# Altium PCB Infrared_Send.PcbDoc
Units mil, origin at the board's own origin, x right, y up, seen from the top; angles counter-clockwise.
Board outline 2559.06 x 1968.5 mil, 2 copper layers (Top Layer, Bottom Layer); 27 components, 26 nets, 105 pads, 30 vias.
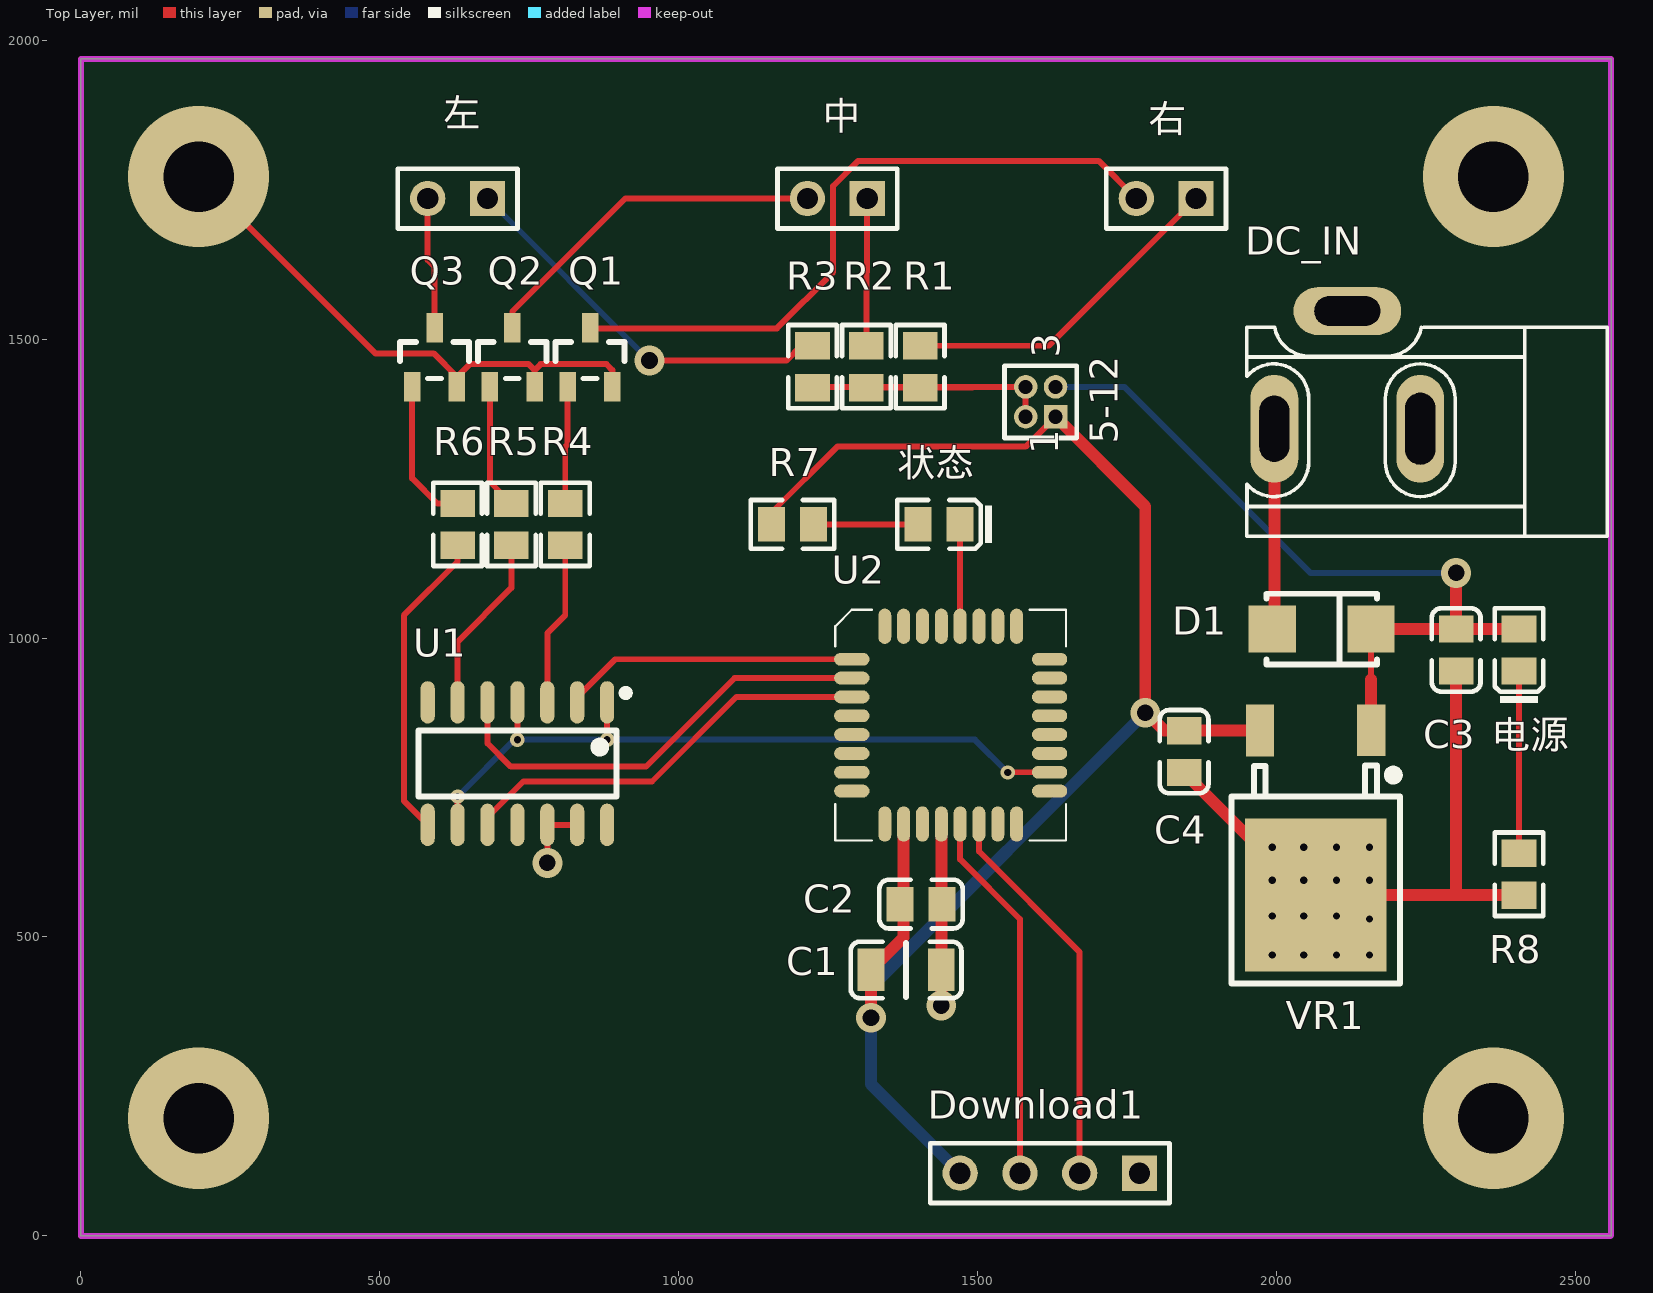
[diagram p0: Top Layer view]
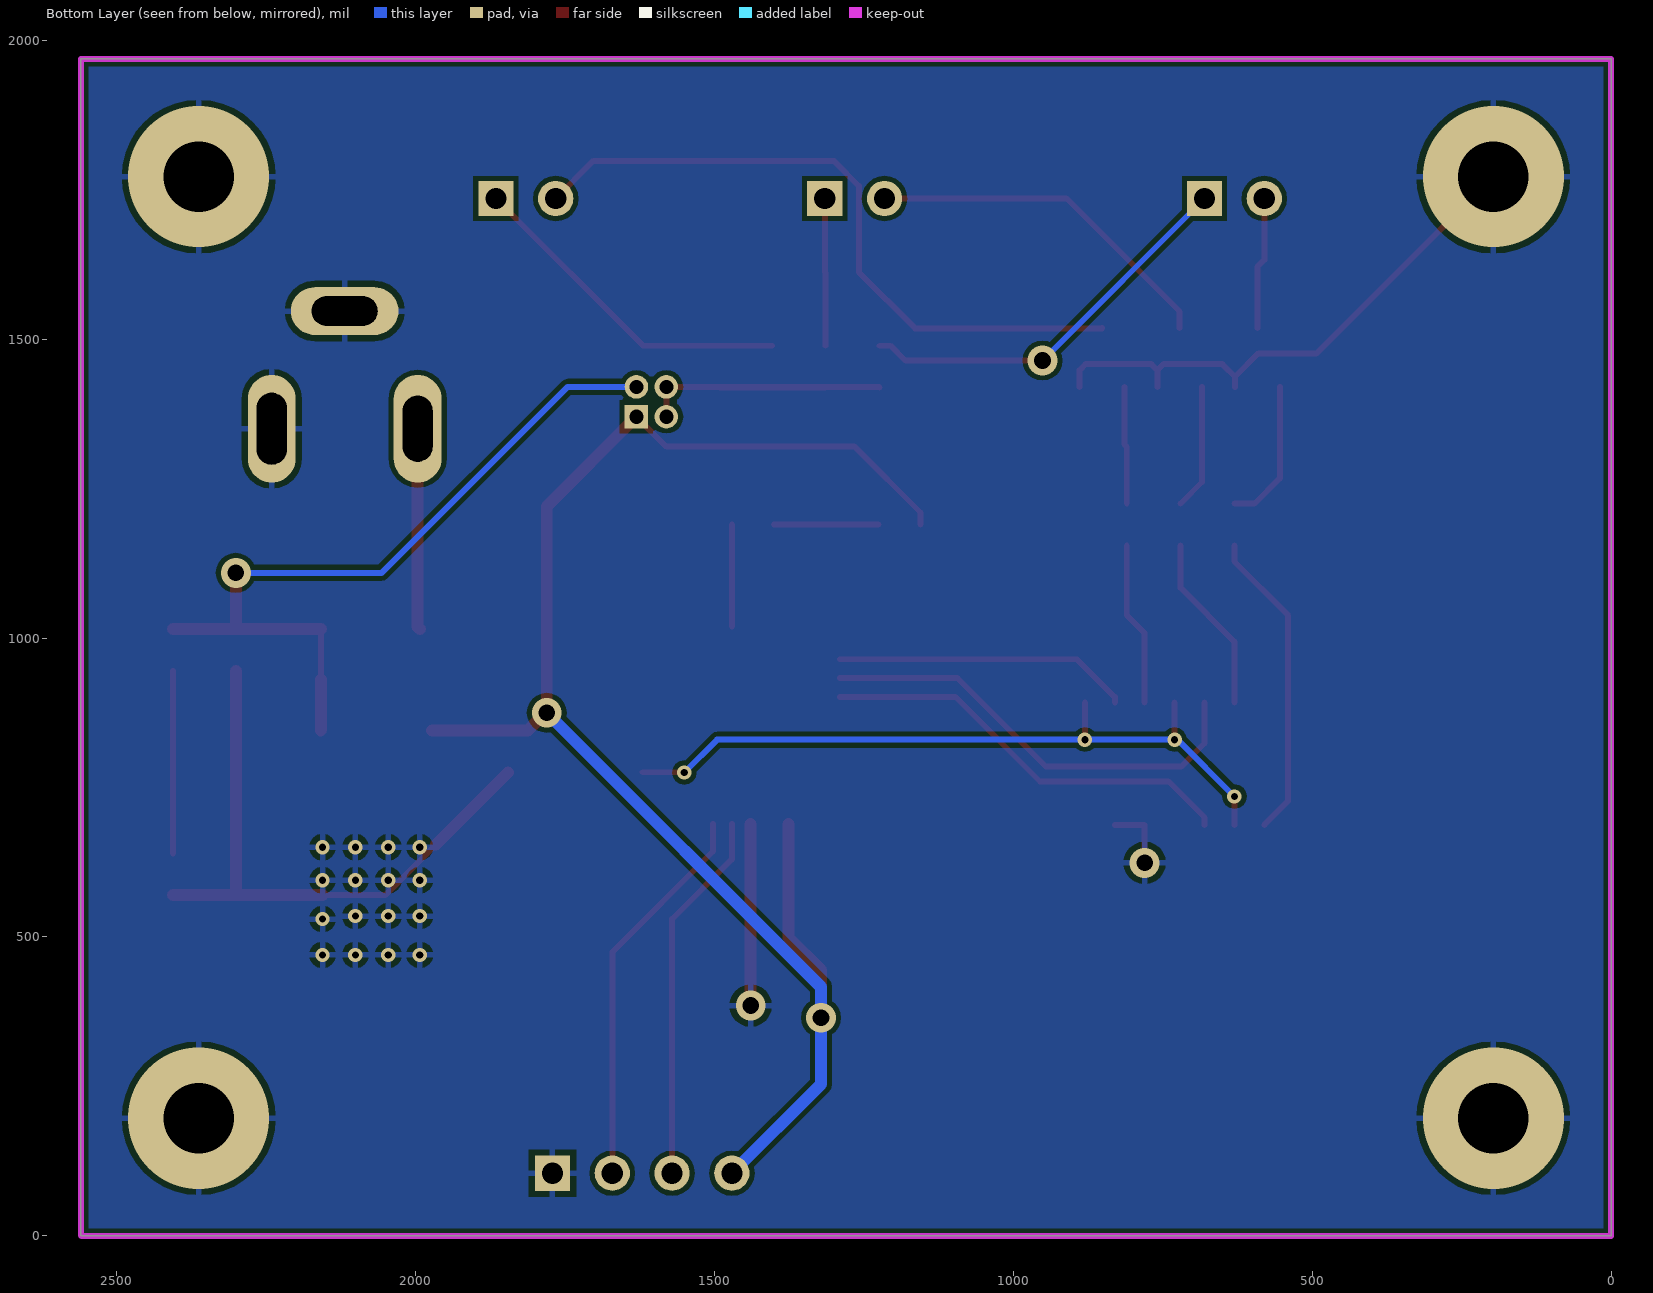
[diagram p1: Bottom Layer view, seen from below]
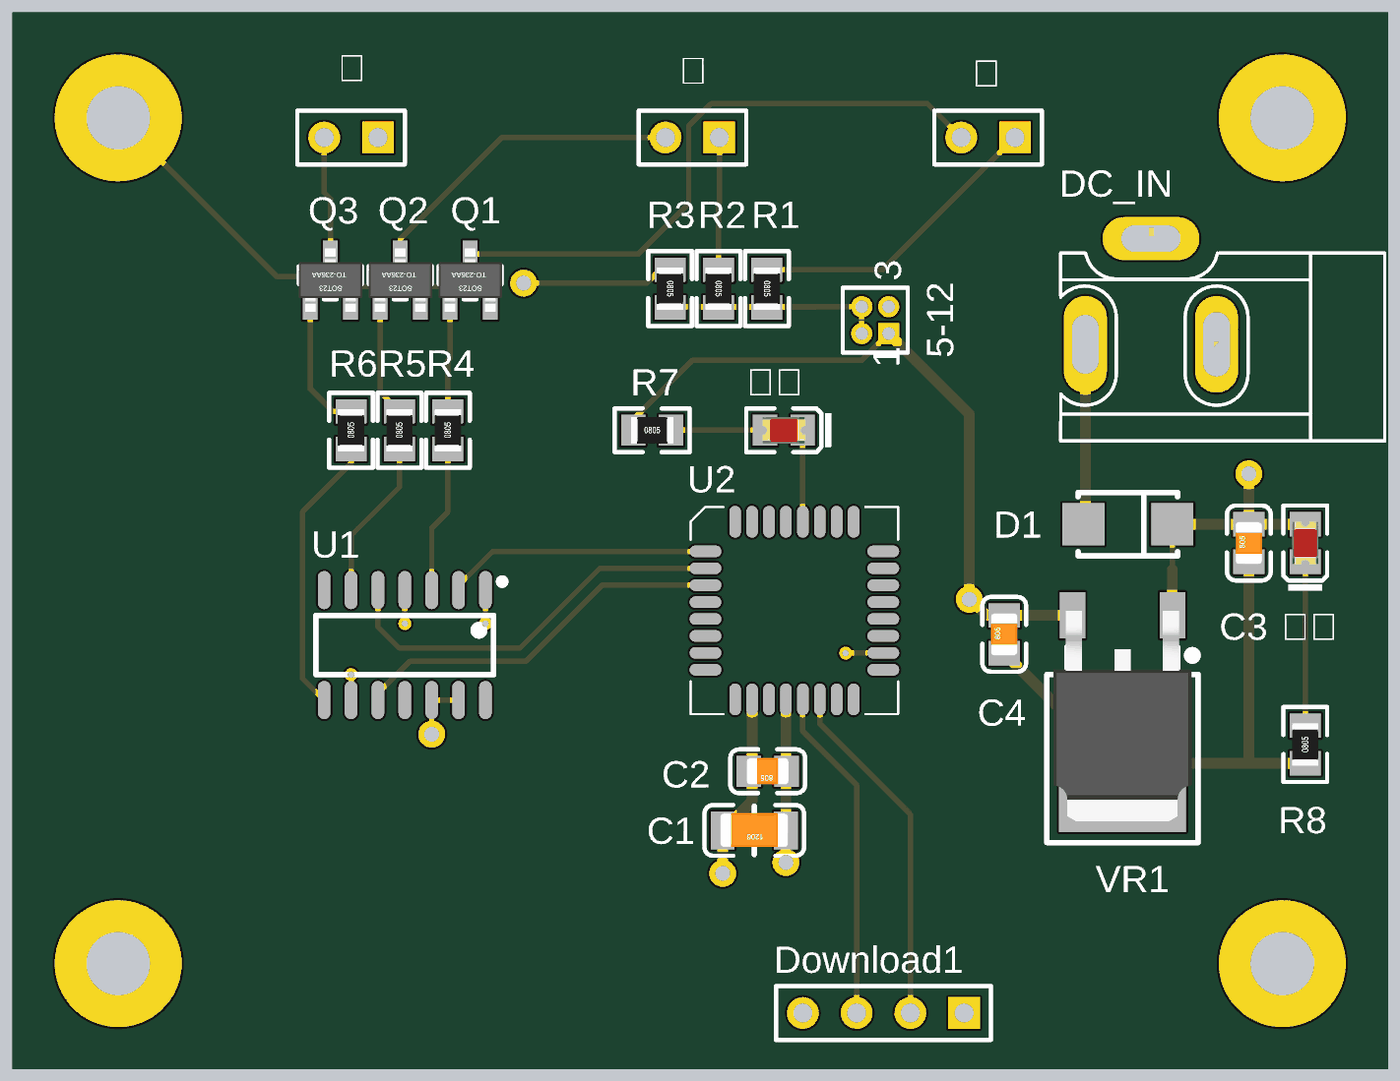
[diagram p2: 3D render of the assembled board from above, using the file's embedded part models]

## Layer stack, top to bottom
Top Solder: solder mask 0.4, Solder Resist, Dk 3.5
Top Layer: signal copper 1.4
Dielectric 1: dielectric 12.6, FR-4, Dk 4.8
Bottom Layer: signal copper 1.4
Bottom Solder: solder mask 0.4, Solder Resist, Dk 3.5

## Board outline
0,0 0,1968.5 2559.05,1968.5 2559.06,0

## Design rules (kind name [scope] priority, off if disabled: settings)
Clearance [All] p1: gap=8 ignorepadtopadclearanceinfootprint=FALSE
PolygonConnect [All] p1: connectstyle=Relief reliefconductorwidth=10 reliefentries=4 polygonreliefangle="90 Angle" airgapwidth=10
RoutingVias [All] p1: holewidth=28 width=50 viastyle="Through Hole" minholewidth=28 minwidth=50 maxholewidth=28 maxwidth=50
SolderMaskExpansion [All] p1: expansion=4
Width [All] p1: maxlimit=20 minlimit=8 preferedwidth=10
30 further rules are at their usual default settings.

## Components (designator, comment, footprint, x,y, rotation, side; value= is the part's Value field where it differs from the comment)
5-12 "MHDR2X2" MHDR2X2 1630,1370 r90 top
C1 "4.7uF (475) 10% 50V" LC-1206_C 1380,445 r180 top
C2 "100nF(104) 10% 50V" LC-0805_C 1405,555 r180 top
C3 "330nF (334) 10% 50V" LC-0805_C 2300,980 r90 top
C4 "100nF(104) 10% 50V" LC-0805_C 1845,810 r90 top
D1 "SS210" LC-SMA(DO-214AC)_S1 2075,1015 r180 top
DC_IN "POWER" DC10B 2415,1520 r180 top
Download1 "Header 4" HDR1X4 1770.39,105 r180 top
Q1 "SS8050 Y1" LC-SOT-23(SOT-23-3) 851.5,1469.41 r270 top locked
Q2 "SS8050 Y1" LC-SOT-23(SOT-23-3) 721.5,1469.41 r270 top locked
Q3 "SS8050 Y1" LC-SOT-23(SOT-23-3) 591.5,1469.41 r270 top locked
R1 "100Ω (1000) ±1%" LC-0805_R 1403.47,1453.76 r270 top locked
R2 "100Ω (1000) ±1%" LC-0805_R 1313.47,1453.76 r270 top locked
R3 "100Ω (1000) ±1%" LC-0805_R 1223.47,1453.76 r270 top locked
R4 "1KΩ (1001) ±1%" LC-0805_R 810,1190 r90 top
R5 "1KΩ (1001) ±1%" LC-0805_R 720,1190 r90 top
R6 "1KΩ (1001) ±1%" LC-0805_R 630,1190 r90 top
R7 "10KΩ (1002) ±1%" LC-0805_R 1190.04,1190 r0 top
R8 "10KΩ (1002) ±1%" LC-0805_R 2405,604.96 r90 top
U1 "74HC08D" LC-SOIC-14_150mil 730,790 r180 top
U2 "STC15F2K60S2_QFP32" LQFP32 1289.29,964.49 r0 top
VR1 "L78M05ABDT-TR" LC-TO-252-2-180 2065,845.59 r270 top
中 "Header 2" HDR1X2 1315,1735 r180 top
右 "Header 2" HDR1X2 1865,1735 r180 top
左 "Header 2" HDR1X2 680,1735 r180 top
状态 "翠绿 0805" LC-0805_LED_S1 1435,1190 r180 top (schematic designator ״̬)
电源 "红灯 0805" LC-0805_LED_S1 2405,980 r90 top

## Footprints (in the part's own frame and the unit in brackets; to place one, negate y for a bottom-side part, rotate by r counter-clockwise, add the part's x,y. Pads: shape width x height; smd on the part's side, far side on the other; paste and mask are expansions set on the pad)
DC10B [mil]
  oval 80x180 hole 50 slot 110 at 90 deg: 1(419.09,170)
  oval 80x180 hole 50 slot 120 at 90 deg: 2(175,170)
  oval 180x80 hole 50 slot 110 at 0 deg: 3(297.05,-26.85)
  silkscreen extent -138,0 465,350
HDR1X2 [mm] "Connector; Header; 2 Position"
  rect 1.5x1.5 hole 0.9: 1(0,0)
  round 1.5 hole 0.9: 2(2.54,0)
  silkscreen extent -1.27,-1.27 3.81,1.27
HDR1X4 [mm] "Connector; Header; 4 Position"
  rect 1.5x1.5 hole 0.9: 1(0,0)
  round 1.5 hole 0.9: 2(2.54,0) 3(5.08,0) 4(7.62,0)
  silkscreen extent -1.27,-1.27 8.89,1.27
LC-0805_C [mm]
  rect 1.16x1.47 smd: 1(-0.89,0) 2(0.89,0)
  silkscreen extent -1.77,-1.04 1.77,1.04, body extent -1,-0.62 1,0.63, height 0.77
LC-0805_LED_S1 [mm]
  rect 1.16x1.47 smd: A(0.89,0) K(-0.89,0)
  silkscreen extent -2.25,-1.03 1.77,1.03, body extent -1.01,-0.62 1.01,0.62, height 1.1
LC-0805_R [mm]
  rect 1.16x1.47 smd: 1(-0.89,0) 2(0.89,0)
  silkscreen extent -1.77,-1.03 1.77,1.04, body extent -1,-0.62 1,0.63, height 0.49
LC-1206_C [mm]
  rect 1.13x1.8 smd: 1(-1.49,0) 2(1.49,0)
  silkscreen extent -2.36,-1.2 2.35,1.2, body extent -1.6,-0.81 1.6,0.79, height 1
LC-SMA(DO-214AC)_S1 [mm]
  rect 2x2 smd: 1(2.1,0) 2(-2.1,0)
  silkscreen extent -2.35,-1.5 2.35,1.5
LC-SOIC-14_150mil [mm]
  oval 0.6x1.8 smd: 1(-3.81,-2.6) 2(-2.54,-2.6) 3(-1.27,-2.6) 4(0,-2.6) 5(1.27,-2.6) 6(2.54,-2.6) 7(3.81,-2.6) 8(3.81,2.6) 9(2.54,2.6) 10(1.27,2.6) 11(0,2.6) 12(-1.27,2.6) 13(-2.54,2.6) 14(-3.81,2.6)
  silkscreen extent -4.75,-3.15 4.2,1.4
LC-SOT-23(SOT-23-3) [mm]
  rect 1.25x0.7 smd: 1(1.25,-0.95) 2(1.25,0.95) 3(-1.25,0)
  silkscreen extent -0.65,-1.46 0.9,1.46, body extent -1.5,-1.5 1.5,1.5, height 1.3
LC-TO-252-2-180 [mm] "180度编带包装"
  rect 2.2x1.2 smd: 1(0,2.361) 3(0.004,-2.361)
  rect 6.5x6 smd: 2(7,0)
  silkscreen extent 1.5,-3.57 10.75,3.57, body extent -0.2,-3.27 9.74,3.27, height 2.44
LQFP32 [mm]
  oval 1.5x0.55 smd: 1(0,0) 2(0,-0.8) 3(0,-1.6) 4(0,-2.4) 5(0,-3.2) 6(0,-4) 7(0,-4.8) 8(0,-5.6) 17(8.4,-5.6) 18(8.4,-4.8) 19(8.4,-4) 20(8.4,-3.2) 21(8.4,-2.4) 22(8.4,-1.6) 23(8.4,-0.8) 24(8.4,0)
  oval 0.55x1.5 smd: 9(1.4,-7) 10(2.2,-7) 11(3,-7) 12(3.8,-7) 13(4.6,-7) 14(5.4,-7) 15(6.2,-7) 16(7,-7) 25(7,1.4) 26(6.2,1.4) 27(5.4,1.4) 28(4.6,1.4) 29(3.8,1.4) 30(3,1.4) 31(2.2,1.4) 32(1.4,1.4)
  silkscreen extent -0.7,-7.7 9.1,2.1
MHDR2X2 [mm] "Connector; Header; 2x2 Position"
  rect 1x1 hole 0.6: 1(0,0)
  round 1 hole 0.6: 2(0,1.27) 3(1.27,0) 4(1.27,1.27)
  silkscreen extent -0.9,-0.9 2.17,2.17

## Part data
5-12: "Header, 2-Pin, Dual row", LatestRevisionDate=17-Jul-2002, LatestRevisionNote="Re-released for DXP Platform.", Publisher="Altium Limited"
C1: library part "1206 4.7uF (475) 10% 50V", "贴片电容", Package=1206, SuppliersPartNumber=C29823, ComponentLink1Description=供应商链接, ComponentLink1URL=http://www.szlcsc.com/product/details_30577.html, Supplier=LC
C2 C4: library part "0805 100nF(104) 10% 50V", "贴片电容", Package=0805, SuppliersPartNumber=C49678, ComponentLink1Description=供应商链接, ComponentLink1URL=http://www.szlcsc.com/product/details_50686.html, Supplier=LC
C3: library part "0805 330nF (334) 10% 50V", "贴片电容", Package=0805, SuppliersPartNumber=C1740, ComponentLink1Description=供应商链接, ComponentLink1URL=http://www.szlcsc.com/product/details_2092.html, Supplier=LC
D1: library part "SMA(DO-214AC) SS210", "二极管", Package=SMA(DO-214AC), SuppliersPartNumber=C14996, ComponentLink1Description=供应商链接, ComponentLink1URL=http://www.szlcsc.com/product/details_15669.html, Supplier=LC
DC_IN: library part POW
Download1: "Header, 4-Pin", LatestRevisionDate=17-Jul-2002, LatestRevisionNote="Re-released for DXP Platform.", Publisher="Altium Limited"
Q1 Q2 Q3: library part "SOT-23 SS8050 Y1", "三极管", Package=SOT-23, SuppliersPartNumber=C2150, ComponentLink1Description=供应商链接, ComponentLink1URL=http://www.szlcsc.com/product/details_2507.html, Supplier=LC
R1 R2 R3: library part "0805 100Ω (1000) 1%", "贴片电阻", Package=0805, SuppliersPartNumber=C17408, ComponentLink1Description=供应商链接, ComponentLink1URL=http://www.szlcsc.com/product/details_18096.html, Supplier=LC
R4 R5 R6: library part "0805 1KΩ (1001) 1%", "贴片电阻", Package=0805, SuppliersPartNumber=C17513, ComponentLink1Description=供应商链接, ComponentLink1URL=http://www.szlcsc.com/product/details_18201.html, Supplier=LC
R7 R8: library part "0805 10KΩ (1002) 1%", "贴片电阻", Package=0805, SuppliersPartNumber=C17414, ComponentLink1Description=供应商链接, ComponentLink1URL=http://www.szlcsc.com/product/details_18102.html, Supplier=LC
U1: "74系列逻辑芯片", Package=SOIC-14_150mil, SuppliersPartNumber=C5593, ComponentLink1Description=供应商链接, ComponentLink1URL=http://www.szlcsc.com/product/details_6044.html, Supplier=LC
VR1: library part "TO-252-2 L78M05ABDT-TR", "低压差线性稳压(LDO)", Package=TO-252-2, SuppliersPartNumber=C58069, ComponentLink1Description=供应商链接, ComponentLink1URL=http://www.szlcsc.com/product/details_59107.html, Supplier=LC
中 右 左: "Header, 2-Pin", LatestRevisionDate=17-Jul-2002, LatestRevisionNote="Re-released for DXP Platform.", Publisher="Altium Limited"
状态: library part "0805 翠绿", "发光二极管", Package=0805, SuppliersPartNumber=C2297, ComponentLink1Description=供应商链接, ComponentLink1URL=http://www.szlcsc.com/product/details_2670.html, Supplier=LC
电源: library part "0805 红灯", "发光二极管", Package=0805, SuppliersPartNumber=C2295, ComponentLink1Description=供应商链接, ComponentLink1URL=http://www.szlcsc.com/product/details_2668.html, Supplier=LC

## Via types
v1: diameter 24, hole 12, Top Layer to Bottom Layer, 20 vias
v2: diameter 50, hole 28, Top Layer to Bottom Layer, 6 vias
v3: diameter 236.22, hole 118.11, Top Layer to Bottom Layer, 4 vias

## Nets (pads, with @x,y where several pads share a name; then routed paths per layer and width w, separated by ;. In a path a pad name is that pad's centre, name@x,y a point inside that pad or via, vN(x,y) a via of type N, cw(c..) or ccw(c..) an arc to the next point about the centre after c; other vN are vias at no path point)
38K: U1.1 U1.4 U1.9 U2.18 | length 1224.2
  Top Layer w10: U1.9 v1(630,735) ; v1(730,830) U1.4 ; v1(880,830) U1.1 ; v1@1550,775.51 U2.18
  Bottom Layer w10: v1(630,735) 725,830 v1(730,830) v1(880,830) 1495,830 v1(1550,775)
+5: 5-12.1 C1.2 C2.2 C4.2 Download1.4 R7.1 U2.10 VR1.3 | length 2690.3
  Top Layer w10: R7.1 1155,1210 1265,1320 1580,1320 5-12.1
  Top Layer w20: v2(1321.34,365) C1.2 1375.91,499.57 U2.10 ; 5-12.1 1780,1220 v2(1780,875) ; v2@1781.02,876.02 1811.61,845.43 VR1.3
  Bottom Layer w20: Download1.4 1321.34,254.06 v2(1321.34,365) 1321.34,416.34 v2(1780,875)
+12: 5-12.3 C3.2 D1.2 VR1.1 电源.A | length 1394.5
  Top Layer w10: D1.2 2157.68,930.29 2157.96,930 VR1.1
  Top Layer w20: 2157.68,930.29 2157.68,845.88 VR1.1 ; D1.2 C3.2 C3.2 ; v2(2300,1109) C3.2 ; 电源.A C3.2
  Bottom Layer w10: 5-12.3 1745,1420 2056,1109 v2(2300,1109)
GND: C1.1 C2.1 C3.1 C4.1 DC_IN.2 DC_IN.3 Download1.1 Q1.2 Q2.2 Q3.2 R8.1 U1.12 U1.13 U2.12 VR1.2 | length 2427.2
  Top Layer w10: v3(196.85,1771.65) 492.5,1476 590,1476 628.9,1437.1 Q3.2@628.9,1436.9 ; Q3.2 Q3.2@628.9,1436.9 ; Q2.2 758.9,1448 ; v2(780,624) U1.12 U1.13 ; Q1.2 888.9,1448 878.9,1458 768.9,1458 758.9,1448 ; VR1.2@1965,654.96 2049.96,570 VR1.2 VR1.2@2155,569.96 ; DC_IN.3@2105,1514.45 2137.4,1546.85 DC_IN.3 ; Q3.2@628.9,1436.9 650,1458 748.9,1458 758.9,1448
  Top Layer w20: v2@1438.66,385 v2(1438.9,385.24) U2.12 ; C4.1 VR1.2@1965,654.96 ; VR1.2@2155,569.96 2155.04,569.92 2300,569.92 ; C3.1 2300,569.92 ; R8.1 2300,569.92
  other v1: 1992.32,470 2045,470 2100,470 2155,470 2155,530 1992.32,535 2045,535 2100,535 1992.32,595 2045,595 2100,595 2155,595 1992.32,650 2045,650 2100,650 2155,650
  other v3: 196.85,196.85 2362.2,196.85 2362.2,1771.65
Left: U1.2 U2.1 | length 494.3
  Top Layer w10: U1.2 830,901.07 893.42,964.49 U2.1
Middle: U1.5 U2.2 | length 755.1
  Top Layer w10: U1.5 680,824 719,785 945,785 1092.99,932.99 U2.2
Net5-12_2: 5-12.2 5-12.4 R1.2 R2.2 R3.2 | length 674.1
  Top Layer w10: R3.2 1224.74,1420 1403.47,1420 5-12.4 ; R2.2 R1.2 1491,1418.72 1492.28,1420 5-12.4 ; 5-12.2 5-12.4
NetD1_1: D1.1 DC_IN.1 | length 336.5
  Top Layer w20: D1.1 1995.91,1018.58 DC_IN.1
NetQ1_1: Q1.1 R4.2 | length 196.9
  Top Layer w10: R4.2 810,1320 814.09,1324.09 Q1.1
NetQ1_3: Q1.3 右.2 | length 1140.6
  Top Layer w10: Q1.3 851.5,1518 1164,1518 1258,1612 1258,1756 1300,1798 1702,1798 右.2
NetQ2_1: Q2.1 R5.2 | length 210
  Top Layer w10: Q2.1 684.09,1260.95 R5.2
NetQ2_3: Q2.3 中.2 | length 599.2
  Top Layer w10: Q2.3 721.5,1545.99 910.5,1735 中.2
NetQ3_1: Q3.1 R6.2 | length 246.5
  Top Layer w10: Q3.1 554.09,1266.95 596,1225.04 R6.2
NetQ3_3: Q3.3 左.2 | length 221.1
  Top Layer w10: 左.2 580,1632.5 591.5,1621 Q3.3
NetR1_1: R1.1 右.1 | length 563.5
  Top Layer w10: R1.1 1618.8,1488.8 右.1
NetR2_1: R2.1 中.1 | length 246.8
  Top Layer w10: R2.1 1313.47,1611 1315,1612.53 中.1
NetR3_1: R3.1 左.1 | length 666
  Top Layer w10: v2(951,1464) 1180,1464 1204.8,1488.8 R3.1
  Bottom Layer w10: 左.1 v2(951,1464)
NetR4_1: R4.1 U1.3 | length 275
  Top Layer w10: U1.3 780,1008 810,1038 R4.1
NetR5_1: R5.1 U1.6 | length 299.9
  Top Layer w10: U1.6 630,994 720,1084 R5.1
NetR6_1: R6.1 U1.8 | length 521.2
  Top Layer w10: U1.8 540,727.64 540,1038 630,1128 R6.1
NetR7_2: R7.2 状态.A | length 174.9
  Top Layer w10: R7.2 状态.A
NetR8_2: R8.2 电源.K | length 305
  Top Layer w10: R8.2 电源.K
NetU2_28: U2.28 状态.K | length 170.5
  Top Layer w10: 状态.K 1470.04,1019.96 U2.28
Right: U1.10 U2.3 | length 705.1
  Top Layer w10: U1.10 680,700 740,760 955,760 1096.5,901.5 U2.3
RX: Download1.3 U2.13 | length 625.3
  Top Layer w10: U2.13 1470.39,630 1570.39,530 Download1.3
TX: Download1.2 U2.14 | length 653.7
  Top Layer w10: U2.14 1501.89,643.11 1670.39,474.61 Download1.2
pads on no net: U1.7 U1.11 U1.14 U2.4 U2.5 U2.6 U2.7 U2.8 U2.9 U2.11 U2.15 U2.16 U2.17 U2.19 U2.20 U2.21 U2.22 U2.23 U2.24 U2.25 U2.26 U2.27 U2.29 U2.30 U2.31 U2.32

## Polygon pours and split planes (outlines as drawn)
GND on Bottom Layer "Bottom Layer-GND" (solid, pour order 4): 0,1968.5 2559.06,1968.5 2559.06,0.94 2560,0 0,0

## Keep-outs
Keep-Out Layer:
  lines w10: 0,0 0,1968.5 2559.06,1968.5 2559.06,0.94 2558.11,0 0,0 ; 0,0 0,0

## Silkscreen, mask and mechanical layers (free items; w line width, h text height)
Top Overlay:
  lines w10: 1380,400 1380,490

## Text inside footprints (layer, text, board x,y; h text height)
5-12: Top Overlay "1" at 1650,1307.01 h80 r90; Top Overlay "3" at 1652.74,1468.43 h80 r90